# EAGLE board CT_schematic (EAGLE 7.6.0)

Size 100 x 80 mm. Coordinates in mm from the lower left corner, seen from the top.
Outline: 0,0 100,0 100,80 0,80 0,0
Copper layers (1*16): Top 0.035mm / dielectric 1.5mm / Bottom 0.035mm
Design rules "default": minimum track width 10mil, minimum drill 24mil, track to track 8mil, track to pad 8mil, pad to pad 8mil, via to via 8mil, smd to smd 8mil, copper to edge 40mil, drill to drill 8mil, minimum pad ring 10mil, minimum via ring 8mil, stop-mask expansion 4mil, vias tented up to drill 0mil, thermal gap 10mil

## Footprints (pad centres in the part's own frame; a part is rotated, then mirrored left to right if it is on the bottom)
C0603 = smd 0.8 x 0.8: 1 -0.762,0; 2 0.762,0
C0402 = smd 0.5 x 0.5: 1 -0.508,0; 2 0.508,0
C0805 = smd 1.2 x 1.3: 1 -1.016,0; 2 1.016,0
EXV-9B = smd 2.718 x 1.778: 1 -2.108,0; 2 2.108,0
C1210 = smd 1.2 x 2.5: 1 -1.524,0; 2 1.524,0
EXV-9H = smd 3.505 x 1.676: 1 -2.857,0; 2 2.857,0
PJ-037B_PACKAGE = drill 3.7 square: 1 12,0 | drill 3.2 square: 2 6,0
R0603 = smd 0.8 x 0.8: 1 -0.762,0; 2 0.762,0
WLCSP49 = smd 0.25 x 0.25: A1 -1.2,1.2; A2 -0.8,1.2; A3 -0.4,1.2; A4 0,1.2; A5 0.4,1.2; A6 0.8,1.2; A7 1.2,1.2; B1 -1.2,0.8; B2 -0.8,0.8; B3 -0.4,0.8; B4 0,0.8; B5 0.4,0.8; B6 0.8,0.8; B7 1.2,0.8; C1 -1.2,0.4; C2 -0.8,0.4; C3 -0.4,0.4; C4 0,0.4; C5 0.4,0.4; C6 0.8,0.4; C7 1.2,0.4; D1 -1.2,0; D2 -0.8,0; D3 -0.4,0; D4 0,0; D5 0.4,0; D6 0.8,0; D7 1.2,0; E1 -1.2,-0.4; E2 -0.8,-0.4; E3 -0.4,-0.4; E4 0,-0.4; E5 0.4,-0.4; E6 0.8,-0.4; E7 1.2,-0.4; F1 -1.2,-0.8; F2 -0.8,-0.8; F3 -0.4,-0.8; F4 0,-0.8; F5 0.4,-0.8; F6 0.8,-0.8; F7 1.2,-0.8; G1 -1.2,-1.2; G2 -0.8,-1.2; G3 -0.4,-1.2; G4 0,-1.2; G5 0.4,-1.2; G6 0.8,-1.2; G7 1.2,-1.2
LGA-12 = smd 0.35 x 0.3: 1 -0.8,0.75; 2 -0.8,0.25; 3 -0.8,-0.25; 4 -0.8,-0.75; 7 0.8,-0.75; 8 0.8,-0.25; 9 0.8,0.25; 10 0.8,0.75 | smd 0.3 x 0.35: 5 -0.25,-0.8; 6 0.25,-0.8; 11 0.25,0.8; 12 -0.25,0.8
M10382 = smd 1 x 1: 1 0,0; 2 -1.6,0; 3 -3.2,0; 4 -3.2,-2; 5 -3.2,-3.6; 6 -3.2,-5.2; 7 -3.2,-6.8; 8 -3.2,-8.4; 9 -3.2,-10; 10 -3.2,-11.6; 11 -3.2,-13.2; 12 -3.2,-14.8; 13 -3.2,-16.4; 14 -3.2,-18; 15 -3.2,-19.6; 16 -3.2,-21.2; 17 -3.2,-22.8; 18 -0.55,-22.8; 19 1.05,-22.8; 20 2.65,-22.8; 21 5.3,-22.8; 22 5.3,-21.2; 23 5.3,-19.6; 24 5.3,-18; 25 5.3,-16.4; 26 5.3,-14.8; 27 5.3,-13.2; 28 5.3,-11.6; 29 5.3,-10; 30 5.3,-8.4; 31 5.3,-6.8; 32 5.3,-5.2; 33 5.3,-3.6; 34 5.3,-2; 35 5.3,0; 36 3.7,0
USON-8 = smd 0.3 x 0.4: 1 0,0; 2 0.5,0; 3 1,0; 4 1.5,0; 5 1.5,2.4; 6 1,2.4; 7 0.5,2.4; 8 0,2.4 | smd 1.65 x 0.25: 9 0.75,1.2
ABLS-25.000MHZ-B2F-T = smd 5.6 x 2.8: 1 -3.81,0; 2 5.69,0
ASEK = smd 1.4 x 1: 1 -1.1,-0.8; 2 1.1,-0.8; 3 1.1,0.8; 4 -1.1,0.8
LP2954 = smd 1.6 x 0.6: 1 -2.475,1.905 | smd 1.55 x 0.6: 2 -2.475,0.635; 3 -2.475,-0.635; 4 -2.475,-1.905; 5 2.475,-1.905; 6 2.475,-0.635; 7 2.475,0.635; 8 2.475,1.905
WSON-8 = smd 0.3 x 0.6: 1 -0.75,0; 2 0.05,0; 3 0.85,0; 4 1.65,0; 5 1.65,3.8; 6 0.85,3.8; 7 0.05,3.8; 8 -0.75,3.8 | smd 3 x 2.6: PAD 0.45,1.9
SON-6 = smd 0.55 x 0.3: 1 -0.355,0.5 | smd 0.52 x 0.3: 2 -0.37,0; 3 -0.37,-0.5; 4 0.37,-0.5; 5 0.37,0; 6 0.37,0.5
SW_4-1437565-2 = smd 1.4 x 2.1: 1 -2.23,4.55; 2 -2.23,-4.55; 3 2.23,4.55; 4 2.23,-4.55
LGM67K-G1J2-24-Z = smd 0.8 x 1.4: A -2,0; C 0,0
NC7SZ125M5X = smd 1.3 x 0.7: 1 -1.3,0.95; 2 -1.3,0; 3 -1.3,-0.95; 4 1.3,-0.95; 5 1.3,0.95
DUMMY_PACKAGE_140 = drill 0.3: 1 0,-1; 2 1.5,-1

## Placement (x,y rotation side)
C1  1e-06  [C0603]  -48.26,64.77 0 top  (outside the outline)
C2  1e-07  [C0603]  -52.07,64.77 0 top  (outside the outline)
C3  1e-07  [C0603]  -55.88,64.77 0 top  (outside the outline)
C4  1e-07  [C0603]  -59.69,64.77 0 top  (outside the outline)
C5  1e-07  [C0603]  -63.5,64.77 0 top  (outside the outline)
C6  1e-07  [C0603]  -15.24,69.85 0 top  (outside the outline)
C7  4.7e-06  [C0603]  -44.45,64.77 0 top  (outside the outline)
C8  1e-08  [C0603]  -19.05,69.85 0 top  (outside the outline)
C9  1e-06  [C0603]  -22.86,69.85 0 top  (outside the outline)
C10  1e-11  [C0402]  -15.24,74.93 0 top  (outside the outline)
C11  1e-11  [C0402]  -19.05,74.93 0 top  (outside the outline)
C12  1e-05  [C0805]  -46.99,53.34 0 top  (outside the outline)
C13  1e-07  [C0402]  -22.86,74.93 0 top  (outside the outline)
C14  1e-07  [C0402]  -26.67,74.93 0 top  (outside the outline)
C15  2.2e-11  [C0402]  -58.42,69.85 0 top  (outside the outline)
C16  2.2e-11  [C0402]  -62.23,69.85 0 top  (outside the outline)
C17  1e-07  [C0402]  -30.48,74.93 0 top  (outside the outline)
C18  1e-08  [C0402]  -34.29,74.93 0 top  (outside the outline)
C19  1e-06  [EXV-9B]  -24.13,53.34 0 top  (outside the outline)
C20  2.2e-06  [EXV-9B]  -33.02,53.34 0 top  (outside the outline)
C21  1e-06  [C0603]  -26.67,69.85 0 top  (outside the outline)
C22  1e-05  [C1210]  -16.51,53.34 0 top  (outside the outline)
C23  1e-07  [C0402]  -38.1,74.93 0 top  (outside the outline)
C24  0.0001  [EXV-9H]  -38.1,39.37 0 top  (outside the outline)
C25  0.0001  [EXV-9H]  -49.53,39.37 0 top  (outside the outline)
C26  1e-08  [C0402]  -41.91,74.93 0 top  (outside the outline)
J1  PJ-037B  [PJ-037B_PACKAGE]  -38.1,7.62 0 top  (outside the outline)
R1  10000.0  [R0603]  -60.96,59.69 0 top  (outside the outline)
R2  1000.0  [R0603]  -30.48,69.85 0 top  (outside the outline)
R3  910.0  [R0603]  -34.29,69.85 0 top  (outside the outline)
R4  4700.0  [R0603]  -38.1,69.85 0 top  (outside the outline)
R5  2200.0  [R0603]  -41.91,69.85 0 top  (outside the outline)
R6  2200.0  [R0603]  -45.72,69.85 0 top  (outside the outline)
R7  2200.0  [R0603]  -49.53,69.85 0 top  (outside the outline)
R8  2200.0  [R0603]  -53.34,69.85 0 top  (outside the outline)
R9  10000.0  [R0603]  -15.24,64.77 0 top  (outside the outline)
R10  10000.0  [R0603]  -20.32,64.77 0 top  (outside the outline)
R11  100000.0  [R0603]  -63.5,53.34 0 top  (outside the outline)
R12  100000.0  [R0603]  -15.24,59.69 0 top  (outside the outline)
R13  100000.0  [R0603]  -20.32,59.69 0 top  (outside the outline)
R14  100000.0  [R0603]  -25.4,59.69 0 top  (outside the outline)
R15  100000.0  [R0603]  -30.48,59.69 0 top  (outside the outline)
R16  47000.0  [R0603]  -25.4,64.77 0 top  (outside the outline)
R17  100000.0  [R0603]  -35.56,59.69 0 top  (outside the outline)
R18  100000.0  [R0603]  -40.64,59.69 0 top  (outside the outline)
R19  153694.38  [R0603]  -58.42,53.34 0 top  (outside the outline)
R20  100000.0  [R0603]  -45.72,59.69 0 top  (outside the outline)
R21  10000.0  [R0603]  -30.48,64.77 0 top  (outside the outline)
R22  10000.0  [R0603]  -35.56,64.77 0 top  (outside the outline)
R23  82000.0  [R0603]  -40.64,64.77 0 top  (outside the outline)
R24  300000.0  [R0603]  -50.8,59.69 0 top  (outside the outline)
R25  120000.0  [R0603]  -55.88,59.69 0 top  (outside the outline)
U1  STM32L431CCY6  [WLCSP49]  -45.72,46.99 0 top  (outside the outline)
U2  LIS2HH12TR  [LGA-12]  -53.34,53.34 0 top  (outside the outline)
U3  M10382  [M10382]  -19.05,24.13 0 top  (outside the outline)
U4  SST26WF040BT-104I/NP  [USON-8]  -45.72,73.66 0 top  (outside the outline)
U5  ABLS-25.000MHZ-B2F-T  [ABLS-25.000MHZ-B2F-T]  -26.67,46.99 0 top  (outside the outline)
U6  ASEK-32.768KHz-ECST  [ASEK]  -29.21,39.37 0 top  (outside the outline)
U7  LP2954AIMX/NOPB  [LP2954]  -25.4,30.48 0 top  (outside the outline)
U8  LP2951ACSDX/NOPB  [WSON-8]  -45.72,29.21 0 top  (outside the outline)
U9  TPS3895ADRYR  [SON-6]  -52.07,73.66 0 top  (outside the outline)
U10  4-1437565-2  [SW_4-1437565-2]  -54.61,6.35 0 top  (outside the outline)
U11  Q65110A2395  [LGM67K-G1J2-24-Z]  -53.34,46.99 0 top  (outside the outline)
U12  nc7sz125m5x  [NC7SZ125M5X]  -40.64,53.34 0 top  (outside the outline)
U13  Dummy  [DUMMY_PACKAGE_140]  -49.53,74.93 0 top  (outside the outline)

## Library data of the parts
C1-C26 J1 R1-R25 U1-U13 = circuit_tree

## Nets
CLK_CRYSTAL_U1_D6: C10.1 U1.D6 U5.1
CLK_CRYSTAL_U1_D7: C11.1 U1.D7 U5.2
CLK_U1_C7: U1.C7 U6.3
GND: C1.2 C2.2 C3.2 C4.2 C5.2 C6.2 C7.2 C8.2 C9.2 C10.2 C11.2 C12.2 C13.2 C14.2 C15.2 C16.2 C17.2 C18.2 C19.2 C20.2 C21.2 C22.2 C23.2 C24.2 C25.2 C26.2 J1.2 R2.2 R9.2 R17.2 R20.2 R23.2 R25.2 U1.A6 U1.B1 U1.E7 U1.G2 U2.5 U2.6 U2.7 U2.8 U3.2 U3.4 U3.14 U3.17 U3.21 U3.24 U3.26 U3.28 U3.33 U3.34 U3.35 U3.36 U4.4 U4.9 U6.2 U7.4 U8.3 U8.4 U8.PAD U9.2 U11.C U12.1 U12.3 U13.1
NET_U1_A5: R9.1 U1.A5
NET_U1_B5: R5.1 U1.B5 U3.19
NET_U1_C2: R6.1 U1.C2 U3.18
NET_U1_D5: R4.1 U1.D5 U12.4
NET_U1_E1: R8.1 U1.E1 U2.4
NET_U1_E2: R7.1 U1.E2 U2.1
NET_U1_G6: R3.1 U1.G6 U11.A
NET_U1_G7: R1.1 U1.G7 U10.3 U10.4
NET_U2_2: R10.1 U2.2
NET_U7_3: R15.1 U7.3
NET_U7_5: R14.1 U7.5
NET_U7_7: R16.2 R17.1 U7.7
NET_U8_5: R18.1 U8.5
NET_U8_7: R19.2 R20.1 U8.7
NET_U9_1: R22.1 R23.1 U9.1
NET_U9_3: R24.2 R25.1 U9.3
NET_U9_4: R21.1 U9.4 U12.2
NET_U10_1: R2.1 U10.1 U10.2
PROC_DAC1_OUT2: U1.F5 U13.2
PROC_QUADSPI_BK1_IO0: U1.G4 U4.5
PROC_QUADSPI_BK1_IO1: U1.G5 U4.2
PROC_QUADSPI_BK1_IO2: R12.1 U1.F3 U4.3
PROC_QUADSPI_BK1_IO3: R13.1 U1.F4 U4.7
PROC_QUADSPI_BK1_NCS: R11.1 U1.E5 U4.1
PROC_QUADSPI_CLK: U1.E3 U4.6
VCC_S1_8V4: C19.1 C21.1 C24.1 C25.1 J1.1 R15.2 U7.8 U8.8
VCC_TIER1_1V8: C1.1 C2.1 C3.1 C4.1 C5.1 C6.1 C7.1 C8.1 C9.1 C12.1 C13.1 C14.1 C15.1 C16.1 C17.1 C20.1 C23.1 C26.1 R1.2 R3.2 R4.2 R5.2 R6.2 R7.2 R8.2 R10.2 R11.2 R12.2 R13.2 R14.2 R16.1 R21.2 R22.2 R24.1 U1.A1 U1.A7 U1.B6 U1.F7 U1.G1 U2.9 U2.10 U3.5 U3.25 U3.27 U4.8 U7.1 U9.6 U12.5
VCC_TIER1_3V3: C18.1 C22.1 R18.2 R19.1 U6.4 U8.1

## Tracks (layer width: path | path; a pad name or v marks a point on that pad's centre or on a via)
CLK_CRYSTAL_U1_D6  (2 unrouted)
CLK_CRYSTAL_U1_D7  (2 unrouted)
CLK_U1_C7  (1 unrouted)
GND  (64 unrouted)
NET_U1_A5  (1 unrouted)
NET_U1_B5  (2 unrouted)
NET_U1_C2  (2 unrouted)
NET_U1_D5  (2 unrouted)
NET_U1_E1  (2 unrouted)
NET_U1_E2  (2 unrouted)
NET_U1_G6  (2 unrouted)
NET_U1_G7  (3 unrouted)
NET_U2_2  (1 unrouted)
NET_U7_3  (1 unrouted)
NET_U7_5  (1 unrouted)
NET_U7_7  (2 unrouted)
NET_U8_5  (1 unrouted)
NET_U8_7  (2 unrouted)
NET_U9_1  (2 unrouted)
NET_U9_3  (2 unrouted)
NET_U9_4  (2 unrouted)
NET_U10_1  (2 unrouted)
PROC_DAC1_OUT2  (1 unrouted)
PROC_QUADSPI_BK1_IO0  (1 unrouted)
PROC_QUADSPI_BK1_IO1  (1 unrouted)
PROC_QUADSPI_BK1_IO2  (2 unrouted)
PROC_QUADSPI_BK1_IO3  (2 unrouted)
PROC_QUADSPI_BK1_NCS  (2 unrouted)
PROC_QUADSPI_CLK  (1 unrouted)
VCC_S1_8V4  (7 unrouted)
VCC_TIER1_1V8  (47 unrouted)
VCC_TIER1_3V3  (5 unrouted)